# Altium PCB EPU.PcbDoc
Units mil, origin at the board's own origin, x right, y up, seen from the top; angles counter-clockwise.
Board outline 2755.91 x 2952.76 mil, 2 copper layers (Top Layer, Bottom Layer); 25 components, 23 nets, 118 pads, 0 vias.
Unrouted connection lines stored in the file: 73.
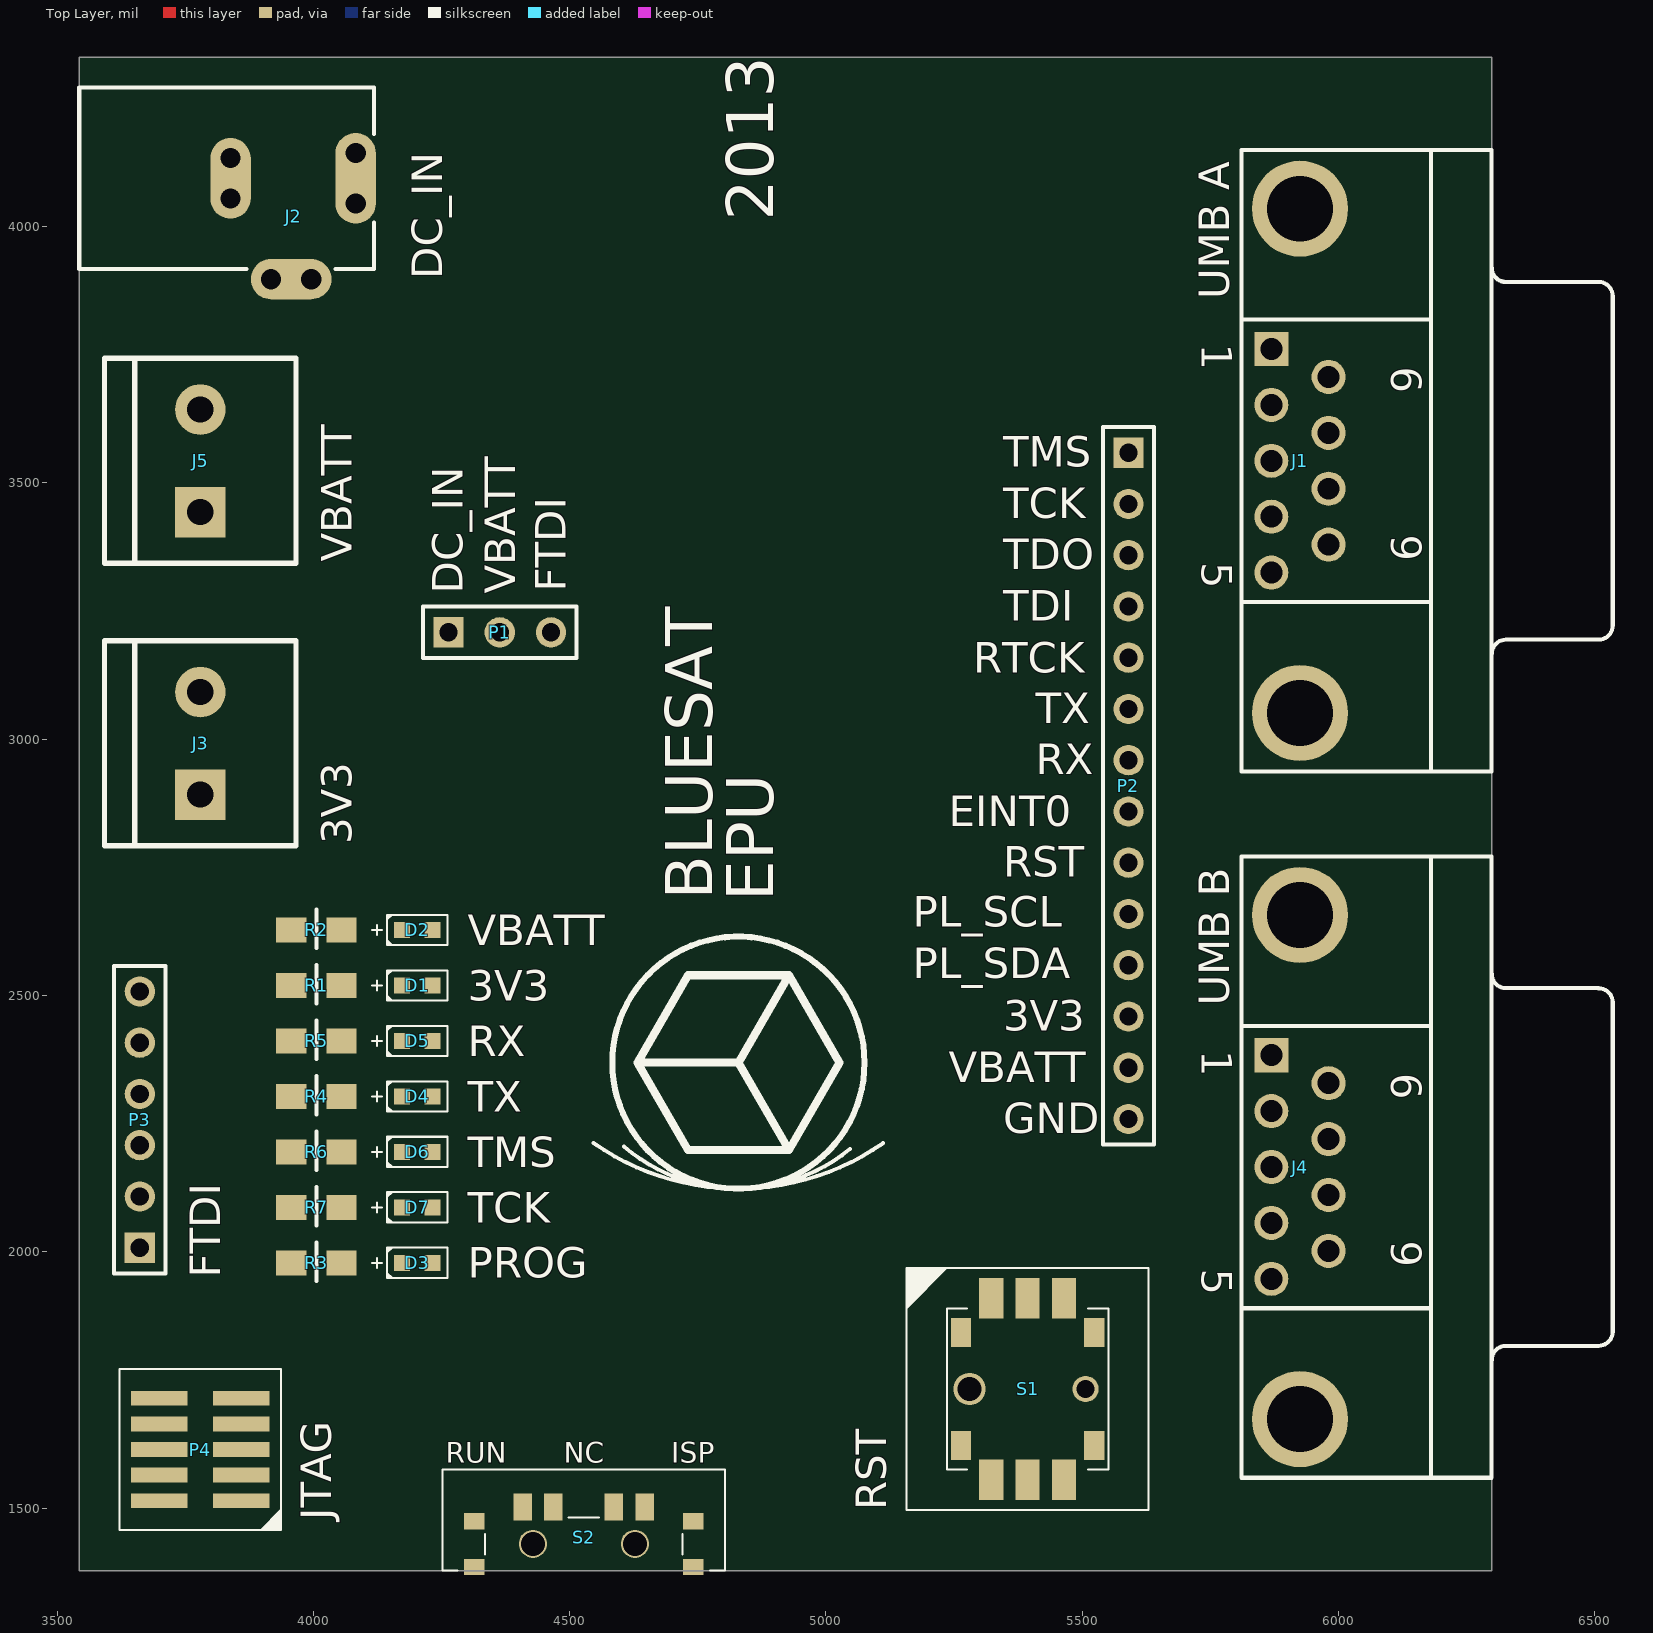
[diagram p0: Top Layer view]
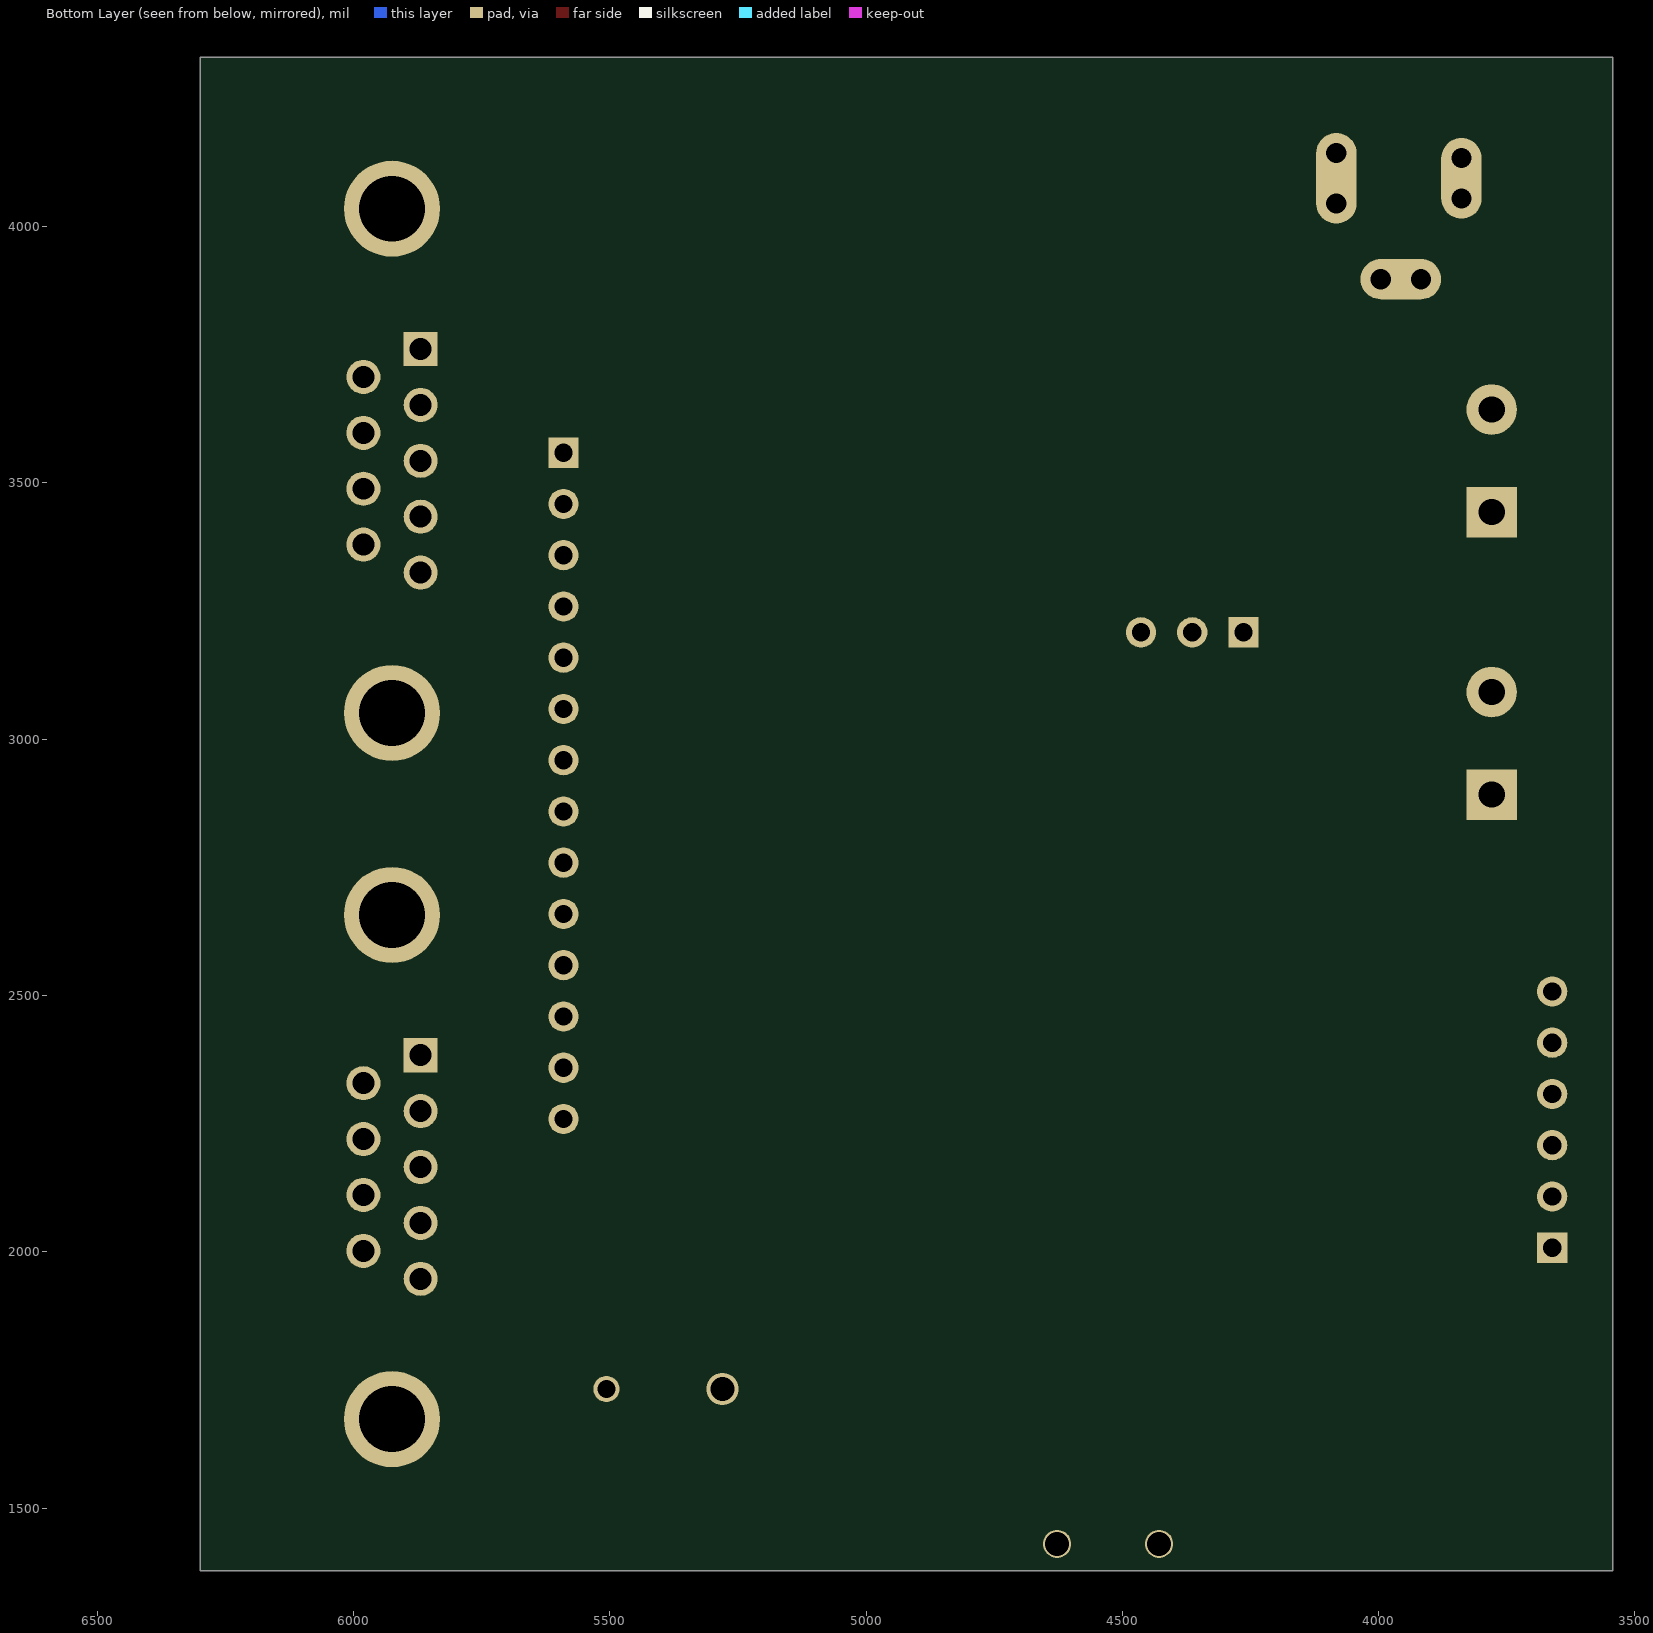
[diagram p1: Bottom Layer view, seen from below]

## Layer stack, top to bottom
Top Layer: signal copper 1.4
Dielectric: dielectric 12.6, FR-4, Dk 4.8
Bottom Layer: signal copper 1.4

## Board outline
3543.31,4330.71 6299.21,4330.71 6299.21,1377.95 3543.31,1377.95

## Design rules (kind name [scope] priority, off if disabled: settings)
Clearance [All] p1: gap=10
PolygonConnect [All] p1: connectstyle=Relief reliefconductorwidth=10 reliefentries=4 polygonreliefangle="90 Angle" airgapwidth=10
RoutingVias [All] p1: holewidth=28 width=50 viastyle="Through Hole" minholewidth=28 minwidth=50 maxholewidth=28 maxwidth=50
SilkscreenOverComponentPads [All] p1: minsilkscreentomaskgap=10
SolderMaskExpansion [All] p1: expansion=4
Width [All] p1: maxlimit=10 minlimit=10 preferedwidth=10
27 further rules are at their usual default settings.

## Components (designator, comment, footprint, x,y, rotation, side; value= is the part's Value field where it differs from the comment)
D1 "3V3" ASMT-Rx45 4202.76,2519.69 r0 top
D2 "VBATT" ASMT-Rx45 4202.76,2627.95 r0 top
D3 "PROG" ASMT-Rx45 4202.76,1978.35 r0 top
D4 "TX" ASMT-Rx45 4202.76,2303.15 r0 top
D5 "RX" ASMT-Rx45 4202.76,2411.42 r0 top
D6 "TMS" ASMT-Rx45 4202.76,2194.88 r0 top
D7 "TCK" ASMT-Rx45 4202.76,2086.61 r0 top
J1 "UMB A" DSUB1.385-2H9 6299.21,3543.31 r270 top
J2 "DC_IN" KLD-0202 3543.31,4094.49 r0 top
J3 "3V3" "5.05mm Terminal Block" 3779.53,2992.13 r90 top
J4 "UMB B" DSUB1.385-2H9 6299.21,2165.35 r270 top
J5 "VBATT" "5.05mm Terminal Block" 3779.53,3543.31 r90 top
P1 "VBATT_SEL" HDR1X3 4263.78,3208.66 r0 top
P2 "" HDR1X14 5590.55,3559.06 r270 top
P3 "FTDI" HDR1X6 3661.42,2007.87 r90 top
P4 "JTAG" FTSH-105-01-L-DV-TR 3779.53,1614.17 r90 top
R1 "Res3" "0805 Cap" 4005.91,2519.69 r0 top
R2 "Res3" "0805 Cap" 4005.91,2627.95 r0 top
R3 "Res3" "0805 Cap" 4005.91,1978.35 r0 top
R4 "Res3" "0805 Cap" 4005.91,2303.15 r0 top
R5 "Res3" "0805 Cap" 4005.91,2411.42 r0 top
R6 "Res3" "0805 Cap" 4005.91,2194.88 r0 top
R7 "Res3" "0805 Cap" 4005.91,2086.61 r0 top
S1 "RST" K5A2 5393.7,1732.28 r0 top
S2 "EINT0" MILL1300S 4527.56,1377.95 r0 top

## Footprints (in the part's own frame and the unit in brackets; to place one, negate y for a bottom-side part, rotate by r counter-clockwise, add the part's x,y. Pads: shape width x height; smd on the part's side, far side on the other; paste and mask are expansions set on the pad)
"5.05mm Terminal Block" [mm]
  rect 2.5x2.5 hole 1.3: 1(-2.54,0)
  round 2.5 hole 1.3: 2(2.54,0)
  silkscreen extent -5.08,-4.75 5.08,4.75
"0805 Cap" [mm] "0805 Capacitor"
  rect 1.5x1.25 smd: 1(1.25,0) 2(-1.25,0)
  silkscreen extent 0,-0.89 0,1.02, body extent -1,-0.63 1.1,0.63, height 0.9
ASMT-Rx45 [mm]
  rect 0.8x0.8 smd: 1(-0.75,0) 2(0.75,0)
  silkscreen extent -2.25,-0.75 1.5,0.75, body extent -0.8,-0.4 0.8,0.4, height 0.45
DSUB1.385-2H9 [mm] "Connector; D Subminiature; 9 Position; Right Angle; Pitch 1.385 mm"
  rect 1.69x1.69 hole 1.09: 1(-5.54,-10.92)
  round 1.69 hole 1.09: 2(-2.77,-10.92) 3(0,-10.92) 4(2.77,-10.92) 5(5.54,-10.92) 6(-4.155,-8.08) 7(-1.385,-8.08) 8(1.385,-8.08) 9(4.155,-8.08)
  round 4.76 hole 3.26: 10(-12.495,-9.5) 11(12.495,-9.5)
  silkscreen extent -15.4,-12.4 15.4,6
FTSH-105-01-L-DV-TR [mil] "http://www.samtec.com/ftppub/cpdf/FTSHMKT1.PDF"
  rect 29x110 smd: 1(-100,-80) 2(-100,80) 3(-50,-80) 4(-50,80) 5(0,-80) 6(0,80) 7(50,-80) 8(50,80) 9(100,-80) 10(100,80)
  silkscreen extent -157,-157 157,157, body extent -125,-115 125,115, height 234
HDR1X3 [mm] "Connector; Header; 3 Position"
  rect 1.5x1.5 hole 0.9: 1(0,0)
  round 1.5 hole 0.9: 2(2.54,0) 3(5.08,0)
  silkscreen extent -1.27,-1.27 6.35,1.27
HDR1X6 [mm] "Connector; Header; 6 Position"
  rect 1.5x1.5 hole 0.9: 1(0,0)
  round 1.5 hole 0.9: 2(2.54,0) 3(5.08,0) 4(7.62,0) 5(10.16,0) 6(12.7,0)
  silkscreen extent -1.27,-1.27 13.97,1.27
HDR1X14 [mm] "Connector; Header; 14 Position"
  rect 1.5x1.5 hole 0.9: 1(0,0)
  round 1.5 hole 0.9: 2(2.54,0) 3(5.08,0) 4(7.62,0) 5(10.16,0) 6(12.7,0) 7(15.24,0) 8(17.78,0) 9(20.32,0) 10(22.86,0) 11(25.4,0) 12(27.94,0) 13(30.48,0) 14(33.02,0)
  silkscreen extent -1.27,-1.27 34.29,1.27
K5A2 [mm]
  rect 1x1.42 smd: 0(-3.3,-2.8) 0(-3.3,2.8) 8(3.3,-2.8) 9(3.3,2.8)
  round 1.6 hole 1.2: 0(-2.875,0)
  round 1.3 hole 0.9: 0(2.875,0)
  rect 1.2x2 smd: 1(-1.8,4.5) 2(0,4.5) 3(1.8,4.5) 4(-1.8,-4.5) 5(0,-4.5) 6(1.8,-4.5)
  silkscreen extent -6,-6 6,6, body extent -4.13,-4 4.13,4, height 4.55
KLD-0202 [mm] "DC Power Jack, 2.5mm, KLD Series, PCB Mount"
  oval 2x4.5 all layers, no hole: 1(13.7,0)
  round 1.5 hole 1: 1A(13.7,-1.25) 1B(13.7,1.25) 2A(7.5,-1) 2B(7.5,1) 3A(9.5,-5) 3B(11.5,-5)
  oval 2x4 all layers, no hole: 2(7.5,0)
  oval 4x2 all layers, no hole: 3(10.5,-5)
  silkscreen extent 0,-4.5 14.6,4.5
MILL1300S [mil]
  rect 40x32 smd: 0(-214,7) 0(-214,96) 0(214,7) 0(214,96)
  round 55.12 hole 46.46 paste+0 mask+0: 0(-99,52) 0(100,52)
  rect 36x52 smd: 1(-119,124) 2(-59,124) 3(59,124) 4(119,124)
  silkscreen extent -276,0 276,197, body extent -213,-60 213,139, height 56

## Part data
D1 D2 D3 D4 D5 D6 D7: library part LED, "Typical INFRARED GaAs LED 0603"
J1 J4: library part "D Connector 9", "Receptacle Assembly, 9 Position, Right Angle"
J2: library part PWR2.5, "Low Voltage Power Supply Connector"
J3 J5: library part "Header 2", "Header, 2-Pin"
P1: library part "Header 3", "Header, 3-Pin"
P2: library part "Header 14", "Header, 14-Pin"
P3: library part "Header 6", "Header, 6-Pin"
P4: library part "Header 5X2", "Header, 5-Pin, Dual row"
R1 R2 R3 R4 R5 R6 R7: "Resistor"
S1: library part KS2A, "Tact Switch"
S2: library part MLL1300S, "Slide switch SP3T switch"

## Nets (pads, with @x,y where several pads share a name; then routed paths per layer and width w, separated by ;. In a path a pad name is that pad's centre, name@x,y a point inside that pad or via, vN(x,y) a via of type N, cw(c..) or ccw(c..) an arc to the next point about the centre after c; other vN are vias at no path point)
3V3_BUS: D1.1 D3.1 D4.1 D5.1 J3.1 J4.9 P2.12 P4.2 S2.1
EINT0: J4.7 P2.8 R3.2 S2.3
GND: J1.1 J1.5 J1.10 J1.11 J2.2 J2.2A J2.2B J2.3 J2.3A J2.3B J3.2 J4.1 J4.5 J4.10 J4.11 J5.2 P2.14 P3.1 P4.4 P4.6 P4.10 R1.2 R2.2 R6.2 R7.2 S1.1 S1.3 S1.4 S1.6 S2.4
NetD1_2: D1.2 R1.1
NetD2_2: D2.2 R2.1
NetD3_2: D3.2 R3.1
NetD4_2: D4.2 R4.1
NetD5_2: D5.2 R5.1
NetD6_2: D6.2 R6.1
NetD7_2: D7.2 R7.1
PL_SCL: J4.8 P2.10
PL_SDA: J4.4 P2.11
RST: J4.3 P2.9 P4.9 S1.5
RTCK: J1.8 P2.5 P4.8
RX: J4.2 P2.7 P3.5 R5.2
TCK: D7.1 J1.2 P2.2 P4.3
TDI: J1.3 P2.4 P4.7
TDO: J1.7 P2.3 P4.5
TMS: D6.1 J1.6 P2.1 P4.1
TX: J4.6 P2.6 P3.4 R4.2
VBATT: D2.1 J1.4 J1.9 J5.1 P1.2 P2.13
VIN_DC: J2.1 J2.1A J2.1B P1.1
VIN_FTDI: P1.3 P3.3
pads on no net: P3.2 P3.6 S1.0 S1.2 S1.8 S1.9 S2.0 S2.2

## Silkscreen, mask and mechanical layers (free items; w line width, h text height)
Top Overlay:
  circle w11.81: c4829.42,2368.99 r246.06
  lines w7.87: 4547.15,2211.93 ccw(c4829.42,2615.06) 5111.69,2211.93 ; 4606.03,2205.18 ccw(c4829.42,2467.42) 5047.02,2200.36
  lines w15.75: 4632.57,2368.99 4730.99,2539.47 4927.84,2539.47 ; 4632.57,2368.99 4730.99,2198.51 4927.84,2198.51 ; 4632.57,2368.99 4829.42,2368.99 ; 4829.42,2368.99 4927.84,2198.51 ; 4829.42,2368.99 4927.84,2539.47 ; 4927.84,2198.51 5026.27,2368.99 4927.84,2539.47
  text "TMS" at 5346.46,3531.5 h60
  text "TCK" at 5346.46,3431.5 h60
  text "TDO" at 5346.46,3331.5 h60
  text "FTDI" at 4492.13,3287.4 h60 r90
  text "DC_IN" at 4291.34,3283.46 h60 r90
  text "VBATT" at 4393.7,3283.46 h60 r90
  text "TDI" at 5346.46,3231.5 h60
  text "RTCK" at 5287.4,3129.92 h60
  text "TX" at 5409.45,3031.5 h60
  text "RX" at 5409.45,2931.5 h60
  text "EINT0" at 5240.16,2830.71 h60
  text "RST" at 5346.46,2731.5 h60
  text "BLUESAT" at 4809.06,2687.01 h157.48 r90
  text "EPU                           2013" at 4927.84,2683.95 h157.48 r90
  text "PL_SCL" at 5169.29,2633.86 h60
  text "PL_SDA" at 5169.29,2533.86 h60
  text "3V3" at 5346.46,2431.5 h60
  text "VBATT" at 5240.16,2330.71 h60
  text "GND" at 5346.46,2231.5 h60
  text "RUN" at 4258.58,1587.95 h40
  text "NC" at 4488.58,1587.95 h40
  text "ISP" at 4698.58,1587.95 h40

## Text inside footprints (layer, text, board x,y; h text height)
J1: Top Overlay "6" at 6103.35,3726.57 h59.06 r270; Top Overlay "9" at 6103.35,3399.41 h59.06 r270; Top Overlay "5" at 5733.27,3344.88 h59.06 r270; Top Overlay "1" at 5733.27,3771.26 h59.06 r270
J2: Mechanical 1 "Mech 2 - Clearance, move to internal plane if present" at 3554.57,4293.93 h11.81; Mechanical 1 "Mech 1 - Slot cut-out" at 3554.57,4313.62 h11.81; Mechanical 1 "Assign keep-out area to slot" at 3554.57,4352.99 h11.81; Mechanical 1 "Alert PCB fab to slot details" at 3554.57,4333.3 h11.81
J4: Top Overlay "6" at 6103.35,2348.62 h59.06 r270; Top Overlay "9" at 6103.35,2021.46 h59.06 r270; Top Overlay "5" at 5733.27,1966.93 h59.06 r270; Top Overlay "1" at 5733.27,2393.31 h59.06 r270